# Altium PCB SUBBOARD-EMC_input.PcbDoc
Units mm, origin at the board's own origin, x right, y up, seen from the top; angles counter-clockwise.
Board outline 129 x 140.08 mm, 2 copper layers (Top Layer, Bottom Layer), stack 1.569 mm thick; 61 components, 29 nets, 159 pads, 8 vias.
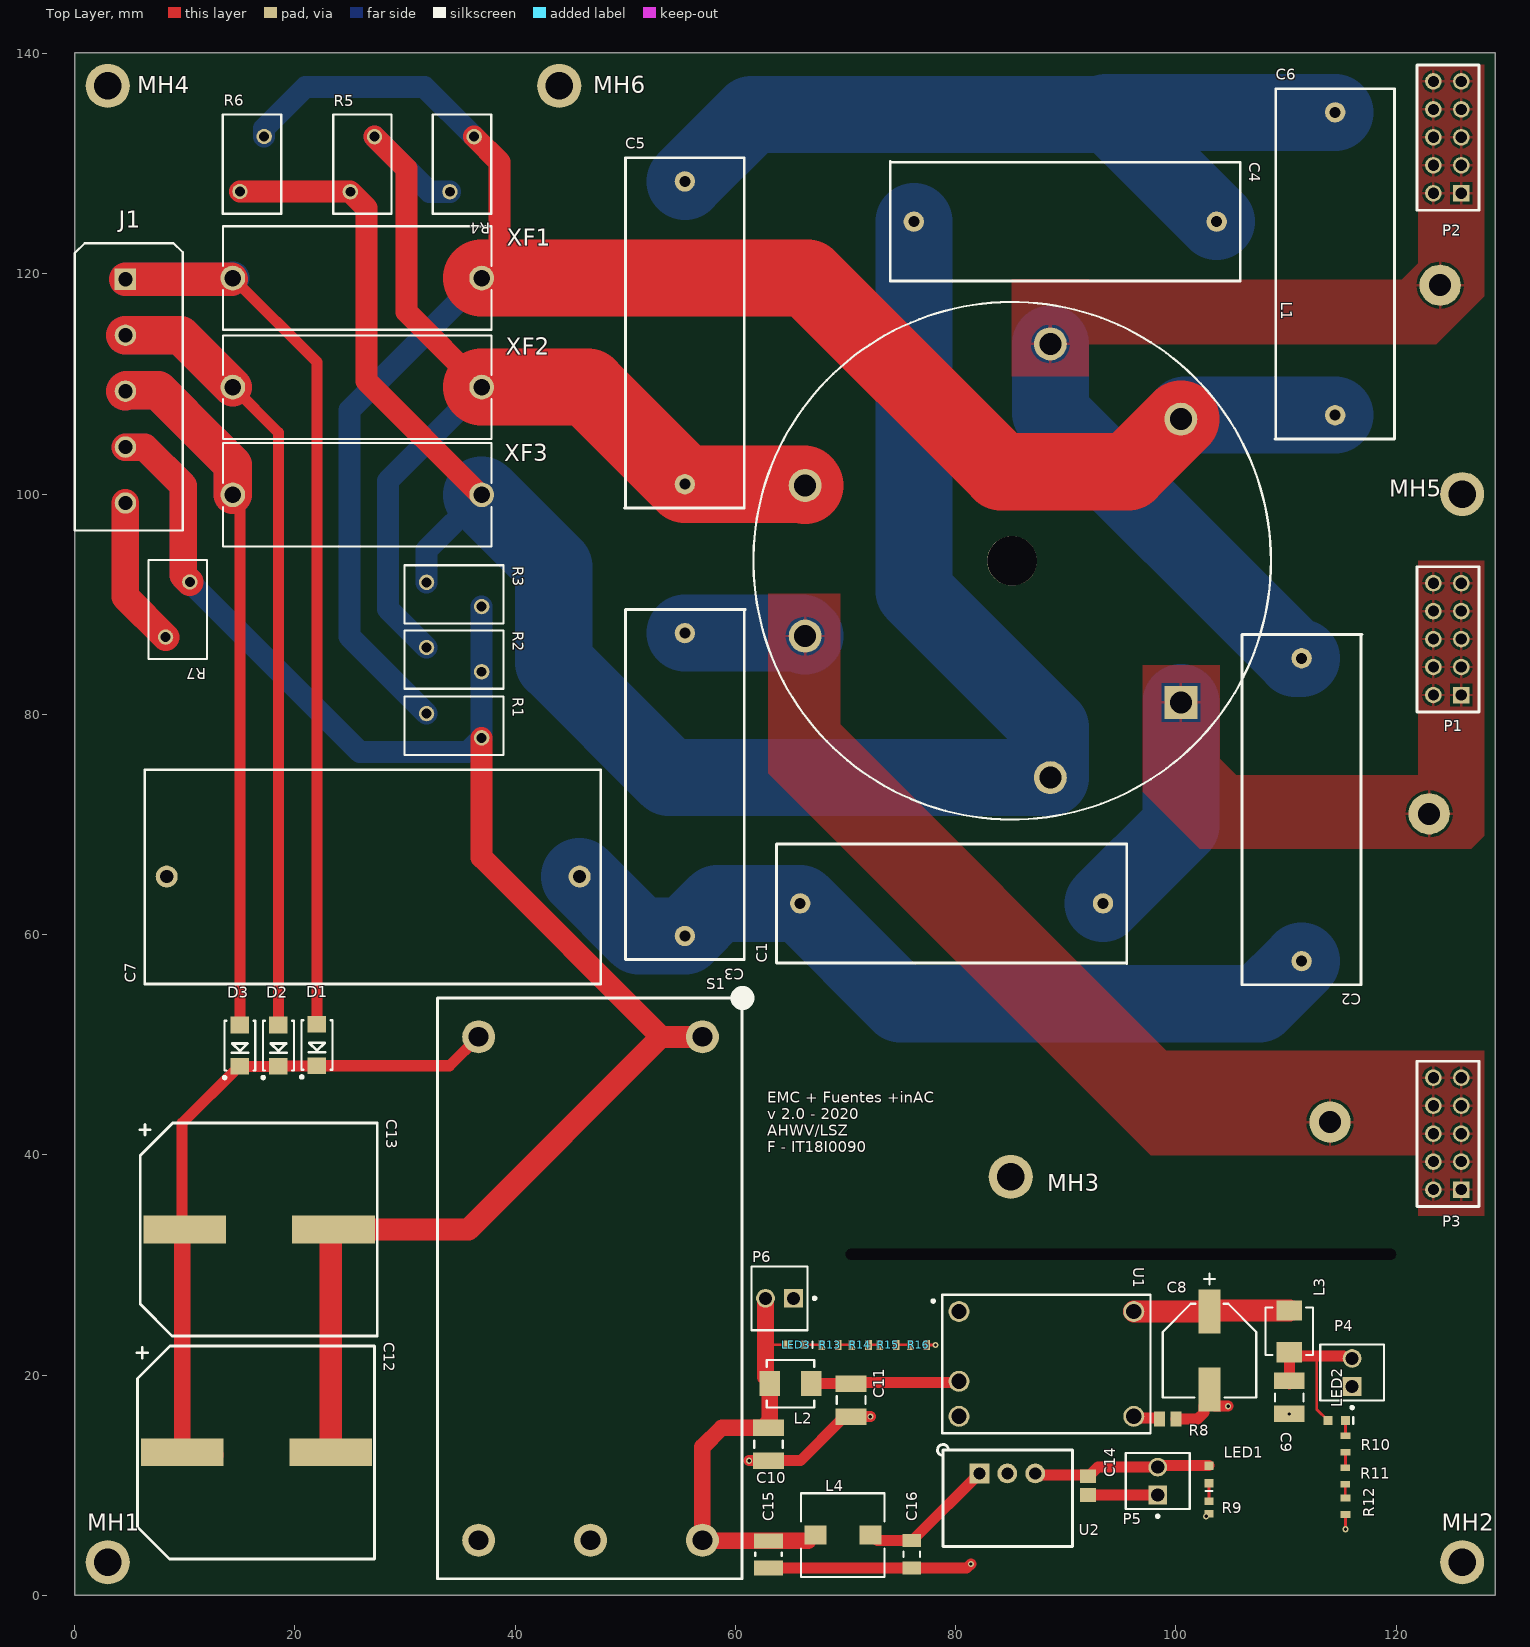
[diagram p0: Top Layer view]
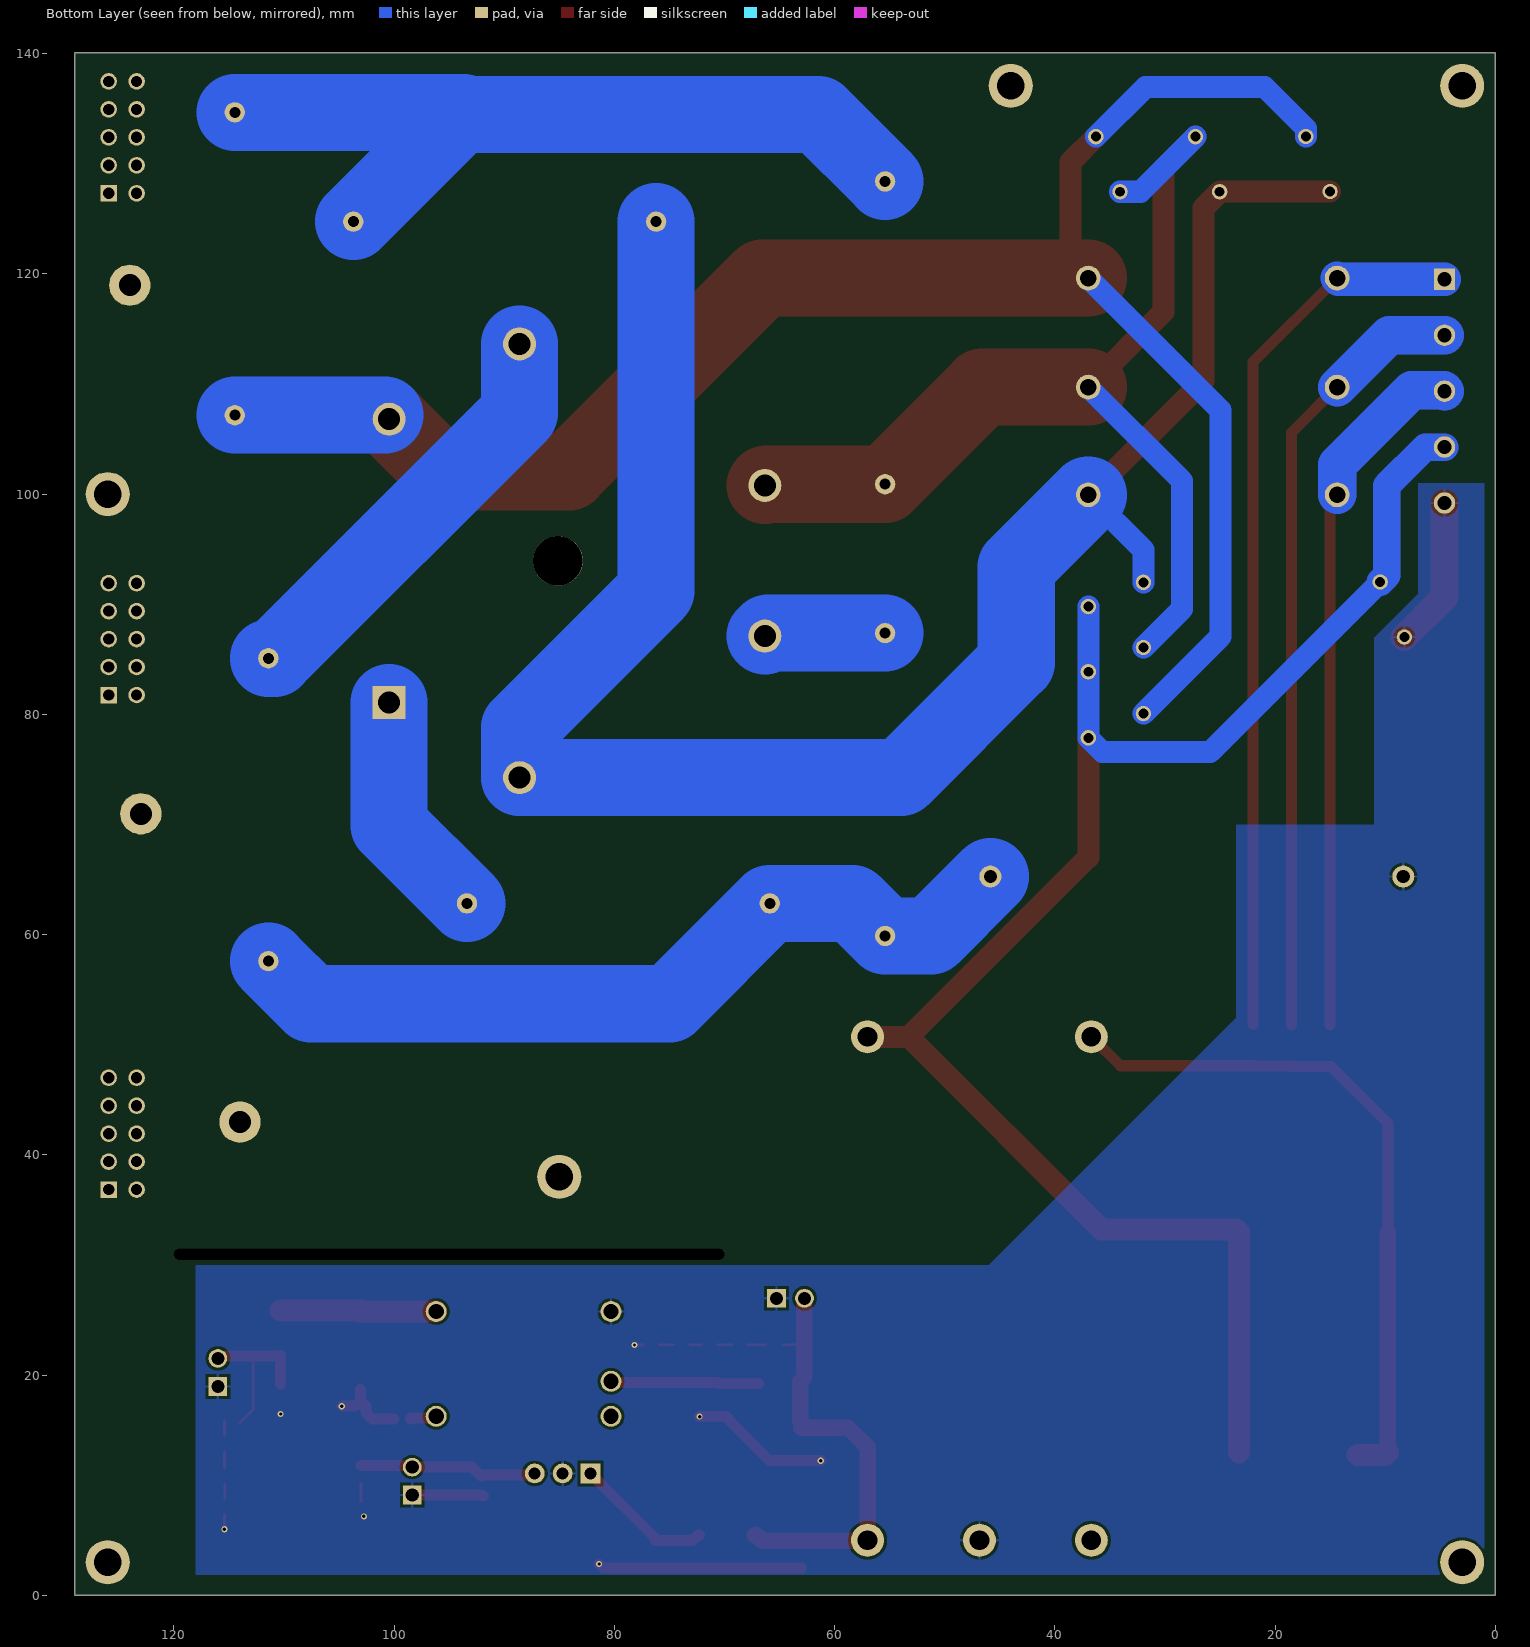
[diagram p1: Bottom Layer view, seen from below]
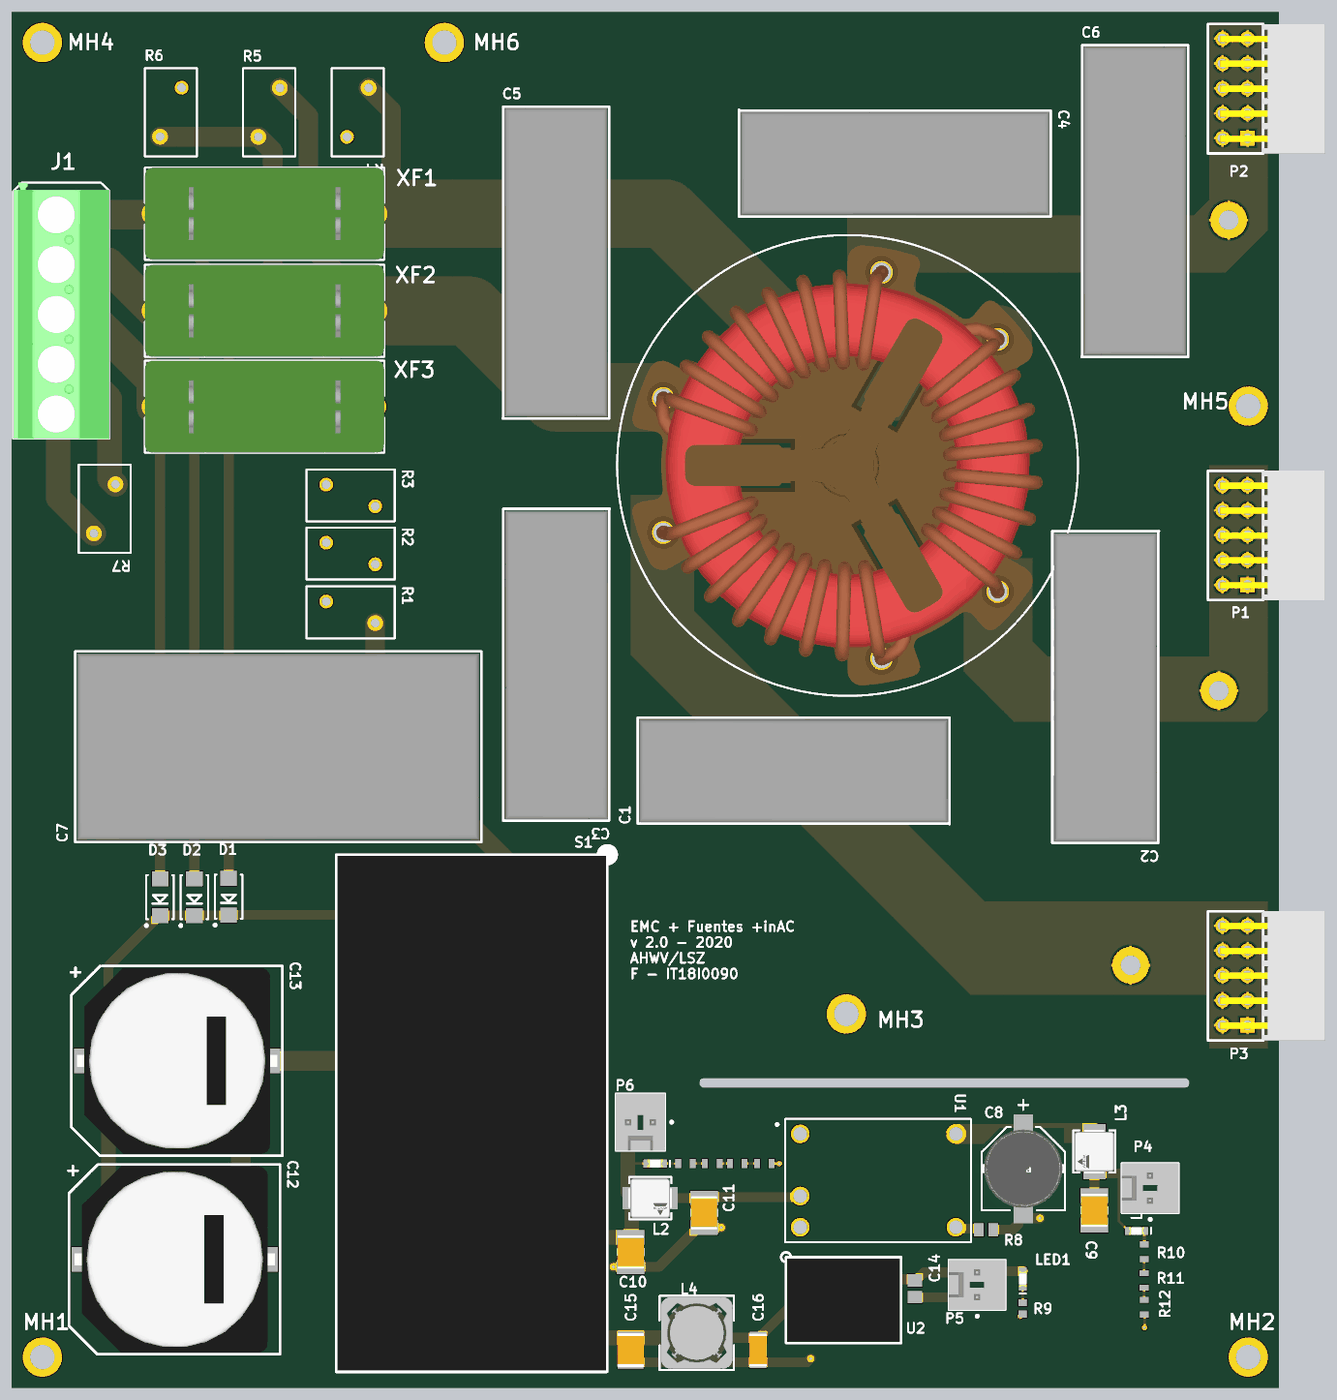
[diagram p2: 3D render of the assembled board from above, using the file's embedded part models]

## Layer stack, top to bottom
Top Solder: solder mask 0.0254, SM-001, Dk 4
Top Layer: signal copper 0.035
Dielectric 1: core 1.4986, Core-043, Dk 4.3
Bottom Layer: signal copper 0.035
Bottom Solder: solder mask 0.0254, SM-001, Dk 4

## Board outline
0,0 0,34.548 0,105.533 0,140.081 129,140.081 129,0

## Design rules (kind name [scope] priority, off if disabled: settings)
Clearance Clearance_HV [InNetClass('PhL[1..3]') or InNetClass('PhG[1..3]') or InNetClass('PhSI[1..3]')] p1: gap=1.5 ignorepadtopadclearanceinfootprint=FALSE // Added Clearence for the 220V power lines
Clearance [All] p2: gap=0.254 ignorepadtopadclearanceinfootprint=FALSE except(0: Arc-Hole Track-Hole SMDPad-Hole THPad-Hole Via-Hole Fill-Hole Poly-Hole Region-Hole Text-Hole)
Height [All] p1: minheight=0 maxheight=40 prefheight=12.7
PolygonConnect [All] p1: thpad.connectstyle=Relief thpad.reliefconductorwidth=0.254 thpad.reliefentries=4 thpad.polygonreliefangle="90 Angle" thpad.airgapwidth=0.254 smdpad.connectstyle=Relief smdpad.reliefconductorwidth=0.254 smdpad.reliefentries=4 smdpad.polygonreliefangle="90 Angle" smdpad.airgapwidth=0.254 via.connectstyle=Direct via.reliefconductorwidth=0.254 via.reliefentries=4 via.polygonreliefangle="90 Angle" via.airgapwidth=0.254
RoomDefinition SUBBOARD-EMC_input [InComponentClass('SUBBOARD-EMC_input')] p1: confinementstyle=ConfineIn formatcopy=TRUE lockcomponents=FALSE outline -10.124,-9.017 137,-9.017 137,145.034 -10.124,145.034
RoutingVias [All] p1: holewidth=0.711 width=1.27 viastyle="Through Hole" minholewidth=0.711 minwidth=1.27 maxholewidth=0.711 maxwidth=1.27
SolderMaskExpansion [All] p1: expansion=0.102 istentingtop=FALSE
Width [All] p1: maxlimit=10 minlimit=0.254 preferedwidth=0.254 minimp=50.000000 maximp=50.000000 favimp=50.000000
29 further rules are at their usual default settings.

## Classes and differential pairs
net class PhSI[1..3]: PhSI1 PhSI2 PhSI3
net class PhL[1..3]: PhL1 PhL2 PhL3
net class PhG[1..3]: PhG1 PhG2 PhG3

## Components (designator, comment, footprint, x,y, rotation, side; value= is the part's Value field where it differs from the comment)
C1 "PHE840MZ7100MF11R06L2" PHE840MZ7100MF11R06L2 79.631,62.83 r180 top
C2 "PHE840MZ7100MF11R06L2" PHE840MZ7100MF11R06L2 111.415,71.339 r270 top
C3 "PHE840MZ7100MF11R06L2" PHE840MZ7100MF11R06L2 55.408,73.625 r270 top
C4 "PHE840MZ7100MF11R06L2" PHE840MZ7100MF11R06L2 89.952,124.743 r0 top
C5 "PHE840MZ7100MF11R06L2" PHE840MZ7100MF11R06L2 55.408,114.646 r90 top
C6 "PHE840MZ7100MF11R06L2" PHE840MZ7100MF11R06L2 114.463,120.916 r90 top
C7 "PHE850ER7100MR03R06L2" PHE850ER7100MR03R06L2 27.1,65.267 r180 top
C8 "EEE-FK1H101P" FP-EEE-FK1H101P-MFG 103.05,22.217 r90 top value=100uF
C9 "C1210C225K5RACTU" CAPC3225X140X50ML20T25 110.3,17.967 r270 top
C10 "C1210C225K5RACTU" CAPC3225X140X50ML20T25 63,13.717 r270 top
C11 "C1210C225K5RACTU" CAPC3225X140X50ML20T25 70.5,17.717 r270 top
C12 "EEV-EB2W220M" EEV-EB2W220M 9.75,12.967 r0 top
C13 "EEV-EB2W220M" EEV-EB2W220M 10,33.217 r0 top
C14 "GRM21BR71A106KE51L" CAPC2013X140X45NL15T25 92,9.967 r90 top
C15 "UMK325BJ106KM-T" CAPC3225X270X60LL30T30 63,3.717 r270 top
C16 "UMK316AB7475KL-T" CAPC3216X180X55LL20T30 76,3.717 r270 top
D1 "BYG23T-M3/TR" BYG23T-M3/TR 22,49.967 r90 top
D2 "BYG23T-M3/TR" BYG23T-M3/TR 18.5,49.917 r90 top
D3 "BYG23T-M3/TR" BYG23T-M3/TR 15,49.917 r90 top
J1 "1715750" SHDR5W110P0X500_1X5_2532X980X1380P 4.608,119.51 r270 top
L1 "744833027110" "WE-TPB_Type 3XL_744833027110" 85.126,93.945 r270 top
L2 "IHLP1616BZER4R7M11" FP-IHLP-1616BZ-FP_1_8545x-MFG#1 65,19.217 r0 top
L3 "IHLP1616BZER4R7M11" FP-IHLP-1616BZ-FP_1_8545x-MFG#2 110.3,23.967 r270 top
L4 "744777910" WE-PD-M-PB 69.75,5.467 r0 top
LED1 "150060BS75000" 0603_A 103,10.967 r90 top
LED2 "150060BS75000" 0603_A 114.6,15.877 r180 top
LED3 "150060BS75000" 0603_A 65.5,22.742 r180 top
MH1 "_MH_2p5_4-round" _MH_2p5_4-round#1 3,3 r0 top
MH2 "_MH_2p5_4-round" _MH_2p5_4-round#1 126,3 r0 top
MH3 "_MH_2p5_4-round" _MH_2p5_4-round#2 85.68,37.697 r0 top
MH4 "_MH_2p5_4-round" _MH_2p5_4-round#3 3.23,134.617 r0 top
MH5 "_MH_2p5_4-round" _MH_2p5_4-round#4 126,100.617 r0 top
MH6 "_MH_2p5_4-round" _MH_2p5_4-round#5 44.37,133.907 r0 top
P1 "IPT1-105-01-S-D-RA" IPT1-105-01-S-D-RA 125.921,81.753 r180 top
P2 "IPT1-105-01-S-D-RA" IPT1-105-01-S-D-RA 125.921,127.318 r180 top
P3 "IPT1-105-01-S-D-RA" IPT1-105-01-S-D-RA 125.921,36.841 r180 top
P4 "22-27-2021" MOLX-22-27-2021_V 116,20.237 r90 top
P5 "22-27-2021" MOLX-22-27-2021_V 98.35,10.367 r90 top
P6 "22-27-2021" MOLX-22-27-2021_V 64,26.967 r180 top
R1 "VDRS07H300BSE" VISH-VDRS07-53x22-2_V 34.442,78.967 r0 top
R2 "VDRS07H300BSE" VISH-VDRS07-53x22-2_V 34.442,84.967 r0 top
R3 "VDRS07H300BSE" VISH-VDRS07-53x22-2_V 34.442,90.888 r0 top
R4 "VDRS07H300BSE" VISH-VDRS07-53x22-2_V 35.171,129.967 r270 top
R5 "VDRS07H300BSE" VISH-VDRS07-53x22-2_V 26.125,129.967 r270 top
R6 "VDRS07H300BSE" VISH-VDRS07-53x22-2_V 16.1,129.967 r90 top
R7 "VDRS07H300BSE" VISH-VDRS07-53x22-2_V 9.35,89.527 r270 top
R8 "ERA6AEB432V" RESC2013X60X40LL20T25 99.25,15.992 r180 top value="4.3 kOhm"
R9 "CRCW060382R0FKEA" RESC1609X50X30LL10T20 103,7.967 r270 top value="82 Ohms"
R10 "200 Ohm" CRCW0603200RFKEAHP 115.39,13.747 r90 top
R11 "200 Ohm" CRCW0603200RFKEAHP 115.38,10.827 r90 top
R12 "200 Ohm" CRCW0603200RFKEAHP 115.39,8.087 r90 top
R13 "200 Ohm" CRCW0603200RFKEAHP 68.6,22.742 r180 top
R14 "200 Ohm" CRCW0603200RFKEAHP 71.33,22.742 r180 top
R15 "200 Ohm" CRCW0603200RFKEAHP 73.87,22.742 r0 top
R16 "200 Ohm" CRCW0603200RFKEAHP 76.64,22.742 r180 top
S1 "RAC20-24SK" RAC20-K 57,50.717 r270 top
U1 "PTN78000HAH" EUS0005A 88.24,21.007 r0 top
U2 "R-78B5.0-2.0" R-78B5.0-2.0 82.15,11.067 r0 top
XF1 "696108003002" 696108003002 25.658,119.62 r180 top
XF2 "696108003002" 696108003002 25.658,109.714 r180 top
XF3 "696108003002" 696108003002 25.658,99.935 r180 top

## Footprints (in the part's own frame and the unit in brackets; to place one, negate y for a bottom-side part, rotate by r counter-clockwise, add the part's x,y. Pads: shape width x height; smd on the part's side, far side on the other; paste and mask are expansions set on the pad)
0603_A [mm] "Chip LED, 2-Leads, Body 1.6x0.8mm, IPC Medium Density"
  rect 0.8x0.8 smd: 1(-0.8,0) 2(0.8,0)
  silkscreen extent -1.5,-0.3 -1.5,0.3, body extent -0.8,-0.4 0.8,0.4, height 0.7
696108003002 [mm]
  round 2.25 hole 1.5: 1(-11.3,0) 2(11.3,0)
  silkscreen extent -12.2,-4.7 12.2,4.7, body extent -12.2,-4.7 12.2,4.7, height 11.55
_MH_2p5_4-round#1 [mm] "Matching hole, 2.5mm hole, 4mm pad (round)"
  round 4 hole 2.5: *(0,0)
_MH_2p5_4-round#2 [mm] "Matching hole, 2.5mm hole, 4mm pad (round)"
  round 4 hole 2.5: *(-0.68,0.303)
_MH_2p5_4-round#3 [mm] "Matching hole, 2.5mm hole, 4mm pad (round)"
  round 4 hole 2.5: *(-0.23,2.463)
_MH_2p5_4-round#4 [mm] "Matching hole, 2.5mm hole, 4mm pad (round)"
  round 4 hole 2.5: *(0,-0.617)
_MH_2p5_4-round#5 [mm] "Matching hole, 2.5mm hole, 4mm pad (round)"
  round 4 hole 2.5: *(-0.37,3.173)
BYG23T-M3/TR [mm] "Fast / Ultrafast Diode, 1.3 kV, 1 A, Single, 1.9 V, 75 ns, 18 A"
  rect 1.52x1.68 smd: 1(-1.88,0) 2(1.88,0)
  silkscreen extent -3.02,-1.4 2.25,1.51, body extent -2.25,-1.39 2.25,1.4, height 2.29
CAPC2013X140X45NL15T25 [mm] "Chip Capacitor, 2-Leads, Body 2.00x1.25mm, IPC Medium Density"
  rect 1.25x1.45 smd: 1(-0.85,0) 2(0.85,0)
  body extent -1.08,-0.7 1.07,0.7, height 1.4
CAPC3216X180X55LL20T30 [mm] "Chip Capacitor, 2-Leads, Body 3.4x1.8mm, IPC High Density"
  rect 1.2x1.7 smd: 1(-1.25,0) 2(1.25,0)
  silkscreen extent -0.25,-0.75 0.25,0.75, body extent -1.7,-0.9 1.7,0.9, height 1.8
CAPC3225X140X50ML20T25 [mm] "Chip Capacitor, 2-Leads, Body 3.40x2.70mm, IPC Low Density"
  rect 1.5x2.8 smd: 1(-1.5,0) 2(1.5,0)
  silkscreen extent -0.35,-1.3 0.35,1.3, body extent -1.7,-1.35 1.7,1.35, height 1.4
CAPC3225X270X60LL30T30 [mm] "Chip Capacitor, 2-Leads, Body 3.50x2.70mm, IPC High Density"
  rect 1.35x2.6 smd: 1(-1.225,0) 2(1.225,0)
  silkscreen extent -0.15,-1.2 0.15,1.2, body extent -1.75,-1.35 1.75,1.35, height 2.7
CRCW0603200RFKEAHP [mm] "RES SMD 200 OHM 1% 1/3W 0603"
  rect 0.6x0.9 smd: 1(-0.75,0) 2(0.75,0)
  body extent -0.75,-0.48 0.75,0.48, height 0.55
EEV-EB2W220M [mm] "Cap Aluminum 22uF 450V 20% (18 X 21.5mm) SMD 560mA 5000 hr 105°C T/R"
  rect 7.5x2.5 smd: 1(0,0) 2(13.5,0)
  silkscreen extent -4.1,-9.67 17.47,9.67, body extent -3.45,-9.5 16.95,9.5, height 21.5
EUS0005A [mm] "5-Leads, Plastic Special Shape, Body 18.92x12.57mm"
  round 1.9 hole 1.4: 1(-7.94,4.76) 2(-7.94,-1.58) 3(-7.94,-4.76) 4(7.94,-4.76) 5(7.94,4.76)
  silkscreen extent -10.41,-6.28 9.46,6.28, body extent -9.46,-6.28 9.46,6.28, height 8.5
FP-EEE-FK1H101P-MFG [mm]
  rect 4x2 smd paste+0 mask+0: 1(-3.55,0) 2(3.55,0)
  silkscreen extent -4.25,-4.25 7,4.25, body extent -5.8,-4.5 5.8,4.5, height 0.25
FP-IHLP-1616BZ-FP_1_8545x-MFG#1 [mil]
  rect 73.01x90 smd paste+0 mask+0: 1(-74.5,0) 2(74.5,0)
  silkscreen extent -85,-85 85,85, body extent -88,-80 88,80, height 79
FP-IHLP-1616BZ-FP_1_8545x-MFG#2 [mil]
  rect 73.01x90 smd: 1(-74.5,0) 2(74.5,0)
  silkscreen extent -85,-85 85,85, body extent -115,-89 115,89, height 10
IPT1-105-01-S-D-RA [mm]
  rect 1.5x1.5 hole 1.02: 1(0,0)
  round 1.5 hole 1.02: 2(2.54,0) 3(0,-2.54) 4(2.54,-2.54) 5(0,-5.08) 6(2.54,-5.08) 7(0,-7.62) 8(2.54,-7.62) 9(0,-10.16) 10(2.54,-10.16)
  silkscreen extent -1.6,-11.65 4.03,1.55, body extent -7.9,-11.65 2.83,1.55, height 5.09
MOLX-22-27-2021_V [mm] "Header, 2-Leads, Body 5.8x5.08mm"
  rect 1.7x1.7 hole 1.19: 1(-1.27,0)
  round 1.7 hole 1.19: 2(1.27,0)
  silkscreen extent -3.31,-2.9 2.54,2.9, body extent -2.54,-2.9 2.54,2.9, height 11.72
PHE840MZ7100MF11R06L2 [mm] "CAP FILM 1UF 20% 760VDC RADIAL - KEMET"
  round 1.85 hole 1: 1(-13.75,0) 2(13.75,0)
  silkscreen extent -15.9,-5.4 15.9,5.48, body extent -15.73,-5.23 15.77,5.28, height 20.5
PHE850ER7100MR03R06L2 [mm] "CAP FILM 1UF 20% 1.25KVDC RADIAL KEMET"
  round 2 hole 1.2: 1(-18.75,0) 2(18.75,0)
  silkscreen extent -20.68,-9.7 20.75,9.75, body extent -20.45,-9.5 20.55,9.5, height 36
R-78B5.0-2.0 [mm] "Non-Isolated DC/DC Converters 6.5-32Vin 5Vout 2A SIP3"
  rect 1.8x1.8 hole 1.1: 1(0,0)
  round 1.8 hole 1.1: 2(2.54,0) 3(5.08,0)
  silkscreen extent -3.8,-6.63 8.45,2.62, body extent -3.17,-6.5 8.33,2, height 17.5
RAC20-K [mm]
  round 3 hole 1.8: 1(0,0) 2(0,-20.32) 3(45.72,-20.32) 4(45.72,-10.16) 5(45.72,0)
  silkscreen extent -3.61,-24.05 49.22,3.71, body extent -3.4,-23.92 49.1,3.47, height 23
RESC1609X50X30LL10T20 [mm] "Chip Resistor, 2-Leads, Body 1.55x0.85mm, IPC High Density"
  rect 0.7x0.85 smd: 1(-0.575,0) 2(0.575,0)
  body extent -0.82,-0.48 0.82,0.48, height 0.5
RESC2013X60X40LL20T25 [mm] "Chip Resistor, 2-Leads, Body 2.00x1.25mm, IPC High Density"
  rect 1x1.35 smd: 1(-0.75,0) 2(0.75,0)
  body extent -1.1,-0.72 1.1,0.72, height 0.6
SHDR5W110P0X500_1X5_2532X980X1380P [mm]
  rect 1.95x1.95 hole 1.3: 1(0,0)
  round 1.95 hole 1.3: 2(5.08,0) 3(10.16,0) 4(15.24,0) 5(20.32,0)
  silkscreen extent -3.28,-4.6 22.82,5.2, body extent -3.28,-4.6 22.86,5.2, height 14.25
VISH-VDRS07-53x22-2_V [mm] "THD, 2-Leads, Body 9x5.3mm, Height 11mm"
  round 1.4 hole 0.9: 1(-2.49,1.1) 2(2.51,-1.1)
  silkscreen extent -4.5,-2.65 4.5,2.65, body extent -4.48,-2.65 4.5,2.65, height 10.96
WE-PD-M-PB [mm] "SMD Inductor, 2-Leads, Body 7.3 x 7.3 mm"
  rect 2x1.7 smd: 1(-2.5,0) 2(2.5,0)
  silkscreen extent -3.8,-3.8 3.8,3.8, body extent -3.65,-3.65 3.65,3.65, height 4.09
"WE-TPB_Type 3XL_744833027110" [mm] "Three Phase Common Mode Power Line Choke, body diameter 47mm"
  rect 3x3 hole 2: 1(12.856,15.321)
  round 3 hole 2: 2(-19.696,3.473) 3(6.84,-18.794) 4(19.696,3.473) 5(-6.84,-18.794) 6(-12.856,15.321)
  round 4.5 hole 4.5 unplated: MH1(0,0)
  silkscreen extent -23.5,-23.5 23.5,23.5, body extent -22.44,-21.98 22.44,19.93, height 36.8

## Part data
C1 C2 C3 C4 C5 C6: "CAP FILM 1UF 20% 760VDC RADIAL", Capacitance=1uF, Case/Package=Radial, Dielectric=PP, Manufacturer=KEMET, Max Operating Temperature=105°C, Min Operating Temperature=-55°C, Package Quantity=216, Supplier Part Number 1=399-5431-ND, Tolerance=20%, Voltage=760V, Voltage Rating (AC)=280V, Category="Film Capacitors", ComponentLink1Description=https://datasheet.ciiva.com/241/phe840m20series-241827.pdf?src-supplier=Digi-Key, ComponentLink1URL=https://datasheet.ciiva.com/241/phe840m20series-241827.pdf?src-supplier=Digi-Key, ComponentLink2Description=https://datasheet.ciiva.com/17239/datasheetpn-f840fe105m275c-17239253.pdf?src-supplier=Avnet+Europe, ComponentLink2URL=https://datasheet.ciiva.com/17239/datasheetpn-f840fe105m275c-17239253.pdf?src-supplier=Avnet+Europe, ComponentLink3Description=https://datasheet.ciiva.com/14589/70096376-14589271.pdf?src-supplier=Allied+Electronics, ComponentLink3URL=https://datasheet.ciiva.com/14589/70096376-14589271.pdf?src-supplier=Allied+Electronics, ComponentLink4Description=https://datasheet.ciiva.com/13403/f3294-phe840m-540905-13403690.pdf?src-supplier=Mouser, ComponentLink4URL=https://datasheet.ciiva.com/13403/f3294-phe840m-540905-13403690.pdf?src-supplier=Mouser, Depth=10.5mm, Dielectric Material=PP, Dissipation Factor=0.4%, Height=20.5mm, Height - Seated (Max)=0.807inch, Lead Diameter=0.8mm, Lead Length=30mm, Lead Pitch=27.5mm, Length=31.5mm, Manufacturer Part Number=PHE840MZ7100MF11R06L2, Mount="Through Hole", Number of Pins=2, Packaging=Tray, Pricing 1="1=2,83000, 10=2,28500, 50=1,99440, 100=1,74500, 500=1,32954, 1000=1,16335, 2500=1,12180, 5000=1,09338 (USD)", Radiation Hardening=No, RoHS=Yes, Stock 1=496, Supplier 1=Digi-Key, Supplier 2=Newark, Supplier 3=Arrow, Supplier 4=Mouser, Supplier 5="Allied Electronics", Supplier Part Number 2=61M2385, Supplier Part Number 3=PHE840MZ7100MF11R06L2, Supplier Part Number 4=80-PHE840MZ7100MF11R, Supplier Part Number 5=70096381, Termination=Radial, Voltage Rating (DC)=760V, Width=0.413inch
C7: "CAP FILM 1UF 20% 1.25KVDC RADIAL", Capacitance=1uF, Case/Package=Radial, Dielectric=PP, Manufacturer=KEMET, Max Operating Temperature=110°C, Min Operating Temperature=-55°C, Package Quantity=91, Supplier Part Number 1=399-5425-ND, Tolerance=20%, Voltage=1.25kV, Voltage Rating=300V, Category="Film Capacitors", ComponentLink1Description=https://datasheet.ciiva.com/11791/0900766b807a221a-11791526.pdf?src-supplier=RSComponents, ComponentLink1URL=https://datasheet.ciiva.com/11791/0900766b807a221a-11791526.pdf?src-supplier=RSComponents, ComponentLink2Description=https://datasheet.ciiva.com/241/f3294-phe850-241880.pdf?src-supplier=Digi-Key, ComponentLink2URL=https://datasheet.ciiva.com/241/f3294-phe850-241880.pdf?src-supplier=Digi-Key, Depth=19mm, Dielectric Material=PP, Height=19mm, Height - Seated (Max)=1.417inch, Lead Diameter=1mm, Lead Free="Lead Free", Lead Pitch=37.5mm, Length=41mm, Manufacturer Part Number=PHE850ER7100MR03R06L2, Mount="Through Hole", Packaging=Tray, Pricing 1="1=5,26000, 10=4,73700, 50=4,10560, 100=3,57930, 500=2,94768, 1000=2,77038 (USD)", Radiation Hardening=No, RoHS=Yes, Stock 1=10227, Supplier 1=Digi-Key, Supplier 2=RSComponents, Supplier 3=Mouser, Supplier Part Number 2=6168017, Supplier Part Number 3=80-PHE850ER7100MR03, Termination=Radial, Voltage Rating (AC)=300V, Voltage Rating (DC)=1.25kV, Width=36mm
C8: library part CMP-05427-000005-1, "CAP ALUM 100UF 20% 50V SMD", Capacitance=100uF, Leakage Current=50uA, Manufacturer="Panasonic Electronic Components", Package=0, Ripple Current=350mA, Temperature="-55°C to +105°C", Temperature Range High=+105°C, Temperature Range Low=-55°C, Tolerance=20%, Voltage Rating=50V, Automotive=Yes, Automotive Grade="Grade 2", Category=Cap, ComponentLink2Description=Datasheet, ComponentLink2URL=https://industrial.panasonic.com/cdbs/www-data/pdf/RDE0000/ABA0000C1181.pdf, Device Class L1="Passive Components", Device Class L2=Capacitors, Device Class L3="Aluminum Electrolytic Capacitors", Digikey Description="CAP ALUM 100UF 20% 50V SMD", Dissipation Factor=10%, ESR=0.34Ω, Height=10.5mm, Lead Free=Yes, Life=2000Hours, Manufacturer Part Number=EEE-FK1H101P, Material=Aluminum, Mouser Description="Cap Aluminum Lytic 100uF 50V 20% (8 X 10.2mm) SMD 350mA 2000h 105C Automotive T/R", Octopart=https://octopart.com/eeefk1h101p-panasonic-4642841, RoHS=TRUE
C9 C10 C11: library part CMP-2000-06019-1, "Chip Capacitor, 2.2 uF, +/- 10%, 50 V, -55 to 125 degC, 1210 (3225 Metric), RoHS, Tape and Reel", Capacitance=2.2uF, Capacitance - nF=2200nF, Case Code - in=1210, Case Code - mm=3225, Case Height=1.25mm, Case Length=3.2mm, Case Width=2.5mm, Dielectric=X7R, Manufacturer=Kemet, Maximum Operating Temperature=+125C, Minimum Operating Temperature=-55C, Operating Temperature Range=-55Cto+125C, Package / Case=1210(3225metric), Package Description="2-Pin Surface Mount Device, Body 3.2 x 2.5 mm", Temperature Coefficient / Code=+/-15%, Tolerance=10%, Voltage Rating=50V, Brand=Kemet, Class=Class1, Datasheet URL=http://www.kemet.com/docfinder?Partnumber=C1210C225K5RACTU, Datasheet Version=02/2016, Dimensions=2.5mmWx3.2mmLx1.25mmH, Factory Pack Quantity=2500, Manufacturer URL=http://www.kemet.com/, Mounting Technology=SurfaceMount, Package Reference=1210, Packaging=Reel, Product=GeneralTypeMLCCs, Product Category=MultilayerCeramicCapacitorsMLCC-SMD/SMT, RoHS=Details, Series=C1210C, Termination Style=SMD/SMT, Type=SMDMLCCX7R6.3-250VDCCommericalGrade, Voltage Rating DC=50V
C12 C13: "CAP, ALU ELEC, 22UF, 450V, SMD", Capacitance=22uF, Case/Package=Radial, Dielectric Material=Aluminium, Leakage Current=604uA, Manufacturer=Panasonic, Max Operating Temperature=105°C, Min Operating Temperature=-25°C, Package Quantity=1, Ripple Current=560mA, Supplier Part Number 1=PCE3598CT-ND, Tolerance=20%, Voltage=450V, Category="Aluminum Electrolytic Capacitors", ComponentLink1Description=https://datasheet.ciiva.com/94/aba0000ce11-94804.pdf?src-supplier=Digi-Key, ComponentLink1URL=https://datasheet.ciiva.com/94/aba0000ce11-94804.pdf?src-supplier=Digi-Key, ComponentLink2Description=https://datasheet.ciiva.com/94/aba0000ce11-94805.pdf?src-supplier=Digi-Key, ComponentLink2URL=https://datasheet.ciiva.com/94/aba0000ce11-94805.pdf?src-supplier=Digi-Key, ComponentLink3Description=https://datasheet.ciiva.com/26823/getdatasheetpartid-52298-26823205.pdf?src-supplier=Verical, ComponentLink3URL=https://datasheet.ciiva.com/26823/getdatasheetpartid-52298-26823205.pdf?src-supplier=Verical, ComponentLink4Description=https://datasheet.ciiva.com/94/aba0000ce11-94806.pdf?src-supplier=Digi-Key, ComponentLink4URL=https://datasheet.ciiva.com/94/aba0000ce11-94806.pdf?src-supplier=Digi-Key, ComponentLink5Description=https://datasheet.ciiva.com/14594/70257799-14594134.pdf?src-supplier=Allied+Electronics, ComponentLink5URL=https://datasheet.ciiva.com/14594/70257799-14594134.pdf?src-supplier=Allied+Electronics, ComponentLink6Description=https://datasheet.ciiva.com/8081/aba0000ce11-8081608.pdf?src-supplier=Element14, ComponentLink6URL=https://datasheet.ciiva.com/8081/aba0000ce11-8081608.pdf?src-supplier=Element14, ComponentLink7Description=https://datasheet.ciiva.com/46379/1678957-46379208.pdf?src-supplier=Element14, ComponentLink7URL=https://datasheet.ciiva.com/46379/1678957-46379208.pdf?src-supplier=Element14, ComponentLink8Description=https://datasheet.ciiva.com/14603/70257799-14603849.pdf?src-supplier=Allied+Electronics, ComponentLink8URL=https://datasheet.ciiva.com/14603/70257799-14603849.pdf?src-supplier=Allied+Electronics, ComponentLink9Description=https://datasheet.ciiva.com/31418/1678957-31418299.pdf?src-supplier=Farnell, ComponentLink9URL=https://datasheet.ciiva.com/31418/1678957-31418299.pdf?src-supplier=Farnell, ComponentLink10Description=https://datasheet.ciiva.com/46372/1678957-46372111.pdf?src-supplier=Element14, ComponentLink10URL=https://datasheet.ciiva.com/46372/1678957-46372111.pdf?src-supplier=Element14, Diameter=18mm, Height=21.5mm, Height - Seated (Max)=0.846inch, Lead Free="Lead Free", Lead Length=6.7mm, Lead Pitch=6.7mm, Length=21.5mm, Life (Hours)=5000Hour, Manufacturer Part Number=EEV-EB2W220M, Mount="Surface Mount,PCB", Number of Pins=21, Packaging="Tape and Reel", Pricing 1="1=3,73000, 10=3,00800 (USD)", Radiation Hardening=No, REACH SVHC="No SVHC", Ripple Current (AC)=560mA, RoHS=Yes, Stock 1=806, Supplier 1=Digi-Key, Supplier 2=Digi-Key, Supplier 3=Digi-Key, Supplier 4=Newark, Supplier 5=Mouser, Supplier 6=Farnell, Supplier Part Number 2=PCE3598DKR-ND, Supplier Part Number 3=PCE3598TR-ND, Supplier Part Number 4=85Y5181, Supplier Part Number 5=667-EEV-EB2W220M, Supplier Part Number 6=2326352, Termination=SMD/SMT, Voltage Rating=450V, Voltage Rating (DC)=450V, Width=1.2mm
C14: library part CMP-2007-03395-1, Manufacturer=Murata, Part Number=GRM21BR71A106KE51L
C15: library part CMP-2000-07360-1, "Chip Capacitor, 10 uF, +/- 10%, 50 V, -55 to 85 degC, 1210 (3225 Metric), RoHS, Tape and Reel", Capacitance=10µF, Manufacturer="Taiyo Yuden", Operating Temperature=-55°C~85°C, Package / Case=1210(3225Metric), Package Description="2-Pin Surface Mount Device, Body 3.2 x 2.5 mm", Package Reference=1210, Ratings=-, Standard Package=500, Temperature Coefficient=X5R, Tolerance=±10%, Voltage - Rated=50V, Applications=GeneralPurpose, Catalog Drawings=xMKSeries_1210_2.5, Category=Capacitors, Datasheet URL=https://datasheet.ciiva.com/30051/155umk325bj106km-t-30051915.pdf, Datasheet Version=05/2014, Family=CeramicCapacitors, Features=-, Height - Seated (Max)=-, Lead Spacing=-, Lead Style=-, Manufacturer URL=http://www.t-yuden.com/, Mounting Technology=SurfaceMount, Mounting Type=SurfaceMount,MLCC, Online Catalog=MSeries, Other Names=587-2247-2CEUMK325BJ106KM-TQ4177041UMK325BJ106KM-T-NDUMK325BJ106KMT, Packaging=Tape&Reel(TR), Series=M, Size / Dimension="0.126\"Lx0.098\"W(3.20mmx2.50mm)", Thickness (Max)="0.106\"(2.70mm)"
C16: library part CMP-2000-07358-1, "Chip Capacitor, 4.7 uF, +/- 10%, 50 V, -55 to 125 degC, 1206 (3216 Metric), RoHS, Tape and Reel", Capacitance=4.7µF, Manufacturer="Taiyo Yuden", Operating Temperature=-55°C~125°C, Package / Case=1206(3216Metric), Package Description="2-Pin Surface Mount Device, Body 3.2 x 1.6 mm", Package Reference=1206, Ratings=-, Standard Package=1, Temperature Coefficient=X7R, Tolerance=±10%, Voltage - Rated=50V, Applications=GeneralPurpose, Catalog Drawings=xMKSeries_1206_1.6, Category=Capacitors, Datasheet URL=http://datasheet.octopart.com/UMK316AB7475KL-T-Taiyo-Yuden-datasheet-62109650.pdf, Datasheet Version=02/2016, Family=CeramicCapacitors, Features=-, Height - Seated (Max)=-, Lead Spacing=-, Lead Style=-, Manufacturer URL=http://www.t-yuden.com/, Mounting Technology=SurfaceMount, Mounting Type=SurfaceMount,MLCC, Online Catalog=MSeries, Other Names=587-2994-6, Packaging=Digi-Reel®, Series=M, Size / Dimension="0.126\"Lx0.063\"W(3.20mmx1.60mm)", Thickness (Max)="0.071\"(1.80mm)", Voltage Rating DC=50V
D1 D2 D3: "DIODE AVALANCHE 1300V 1A DO214AC", Average Rectified Current=1A, Case/Package=SMA, Forward Voltage=1.9V, Manufacturer="Vishay Semiconductors", Max Forward Surge Current (Ifsm)=18A, Max Operating Temperature=150°C, Max Power Dissipation=800mW, Max Repetitive Reverse Voltage (Vrrm)=1.3kV, Min Operating Temperature=-55°C, Package Quantity=1, Peak Reverse Current=5uA, Supplier Part Number 1=70AC6454, Zener Voltage=200V, Category="Rectifier Diodes", ComponentLink1Description=https://datasheet.ciiva.com/23642/byg23t-23642320.pdf?src-supplier=Newark, ComponentLink1URL=https://datasheet.ciiva.com/23642/byg23t-23642320.pdf?src-supplier=Newark, ComponentLink2Description=https://datasheet.ciiva.com/30479/0900766b810d43bd-30479333.pdf?src-supplier=RSComponents, ComponentLink2URL=https://datasheet.ciiva.com/30479/0900766b810d43bd-30479333.pdf?src-supplier=RSComponents, ComponentLink3Description=https://datasheet.ciiva.com/4454/byg23t-85630-4454047.pdf?src-supplier=Mouser, ComponentLink3URL=https://datasheet.ciiva.com/4454/byg23t-85630-4454047.pdf?src-supplier=Mouser, ComponentLink4Description=https://datasheet.ciiva.com/920/byg23t-920130.pdf?src-supplier=Digi-Key, ComponentLink4URL=https://datasheet.ciiva.com/920/byg23t-920130.pdf?src-supplier=Digi-Key, ComponentLink5Description=https://datasheet.ciiva.com/920/byg23t-920131.pdf?src-supplier=Digi-Key, ComponentLink5URL=https://datasheet.ciiva.com/920/byg23t-920131.pdf?src-supplier=Digi-Key, ComponentLink6Description=https://datasheet.ciiva.com/920/byg23t-920132.pdf?src-supplier=Digi-Key, ComponentLink6URL=https://datasheet.ciiva.com/920/byg23t-920132.pdf?src-supplier=Digi-Key, ComponentLink7Description=https://datasheet.ciiva.com/1178/byg23t-1178213.pdf?src-supplier=Element14, ComponentLink7URL=https://datasheet.ciiva.com/1178/byg23t-1178213.pdf?src-supplier=Element14, Contact Plating=Tin,Matte, Diode Type=Avalanche, Element Configuration=Single, Forward Current=1A, Height=2.29mm, Length=4.5mm, Manufacturer Part Number=BYG23T-M3/TR, Max Reverse Voltage (DC)=1.3kV, Max Surge Current=18A, Mount="Surface Mount", Number of Pins=2, Packaging="Tape and Reel", Peak Non-Repetitive Surge Current=18A, Pricing 1="1=0.16100, 10=0.16100, 25=0.16100, 50=0.16100, 100=0.16100, 250=0.16100, 500=0.16100, 1000=0.14800 (USD)", Radiation Hardening=No, REACH SVHC=Unknown, Recovery Time=75ns, Reverse Recovery Time=75ns, Reverse Voltage=1.3kV, RoHS=Yes, Stock 1=6980, Supplier 1=Newark, Width=2.79mm
J1: "Phoenix Contact MKDS 1.5/ 5-5.08, 5 Way PCB Terminal Block", Color=Green, Current=15A, Current Rating=17.5A, Manufacturer="Phoenix Contact", Package Quantity=50, Supplier Part Number 1=277-13762-ND, Voltage=300V, Voltage Rating=400V, Category="Terminal Blocks", ComponentLink1Description=https://datasheet.ciiva.com/26340/788258-da-01-en-printklemme-1715750-250-st-26340992.pdf?src-supplier=Conrad, ComponentLink1URL=https://datasheet.ciiva.com/26340/788258-da-01-en-printklemme-1715750-250-st-26340992.pdf?src-supplier=Conrad, Connector Type=Screw, Contact Material=Tin, Height=17.3mm, Housing Color=Green, Housing Material=Nylon, Length=9.8mm, Manufacturer Part Number=1715750, Mount="Through Hole", Number of Levels=1, Number of Pins=5, Number of Positions=5, Number of Positions Per Level=5, Packaging=Bulk, Pitch=0.2inch, Pricing 1="1=3.30000, 10=3.16400, 50=3.02620, 100=2.94360, 250=2.75100, 500=2.53092, 1000=2.33834, 2500=2.22832, 5000=2.09077 (USD)", RoHS=Yes, Stock 1=212, Supplier 1=Digi-Key, Termination=Screw, Weight=1.269863oz, Width=27.94mm, Wire Gauge (Max)=30AWG, Wire Gauge (Min)=14AWG
L1: "WE-TPB Common Mode Power Line Choke, Type 3XL, 2.7mH, 11A, 500V", DC Resistance max.=18mOhm, Inductance=2.7mH, Insulation Test Voltage=2500VAC, Manufacturer="Wurth Elektronik", Operating Temperature="-40 to +125degC", Rated Current=11A, Rated Voltage=500VAC, Supplier Part Number 1=732-13597-ND, ComponentLink1Description=Manufacturer, ComponentLink1URL=http://www.we-online.de, ComponentLink2Description=Datasheet, ComponentLink2URL=https://www.we-online.com/catalog/datasheet/744833027110.pdf, Manufacturer Part Number=744833027110, Mounting Technology=THT, Packaging="Tray and Carton", Published Date="April 2020", Size="Type 3XL", Supplier 1=Digi-Key, Supplier 2=Newark, Supplier 3=Mouser, Supplier 4=Farnell, Supplier Part Number 2=28AH8224, Supplier Part Number 3=710-744833027110, Supplier Part Number 4=3221513
L2 L3: library part CMP-02424-000576-1, "Fixed Inductors Commercial Low DCR Series SMT 4.7uH 1.7A 105mΩ 20%", Case/Package=1616, Current Rating=1.7A, DC Resistance (DCR)=105mR, Inductance=4.7uH, Inductance Tolerance=20%, Max Operating Temperature=125°C, Min Operating Temperature=-55°C, Package Quantity=4000, Saturation Current=1.75A, Self Resonant Frequency=29MHz, Test Frequency=100kHz, Contact Plating=Tin, Core Material=Ferrite, Depth=4.31mm, Height=2mm, Height - Seated (Max)=0.079inch, Lead Free="Lead Free", Length=4.7mm, Max DC Current=1.7A, Military Standard=Not, Mount="Surface Mount", Number of Pins=1616, Packaging="Tape and Reel", Radiation Hardening=No, RMS Current (Irms)=1.7A, Shielding=Shielded, Termination=SMD/SMT, Tolerance=20%, Width=4.06mm
L4: library part CMP-0227-00229-1, "SMD-Shielded Power Inductor WE-PD, L = 10.0 µH", Inductance="10.0 µH", ComponentLink1Description="Manufacturer Link", ComponentLink1URL=http://www.we-online.com, ComponentLink2Description=Datasheet, ComponentLink2URL=http://www.we-online.de/katalog/media/pdf/744777910.pdf, DatasheetVersion="ver 10, Jan-2008", PackageDescription="SMD Inductor, 2-Leads, Body 7.3 x 7.3 mm", PackageReference=WE-PD-M-PB, PackageVersion=2008
LED1 LED2 LED3: library part CMP-1426-00003-1, "SMD mono-color Chip LED, WL-SMCW, Blue", Color=Blue, Manufacturer="Wuerth Elektronik", ComponentLink1Description="Manufacturer URL", ComponentLink1URL=http://www.we-online.com, ComponentLink2Description=Datasheet, ComponentLink2URL=http://katalog.we-online.com/led/datasheet/150060BS75000.pdf, PackageReference=0603_A, PartNumber=150060BS75000
MH1 MH2 MH3 MH4 MH5 MH6: "matching hole 2.5 hole, 4mm pad (round)"
P1 P2 P3: "CONN PLUG .100\" 10POS DL PCB R/A", Color=Black, Manufacturer=Samtec, Max Current Rating=8A, Max Operating Temperature=125°C, Max Voltage Rating (AC)=550V, Min Operating Temperature=-55°C, Supplier Part Number 1=SAM8101-ND, Category=Connectors, ComponentLink1Description=https://datasheet.ciiva.com/716/ipt1-1xx-xx-xx-d-ra-xxx-mkt-716221.pdf?src-supplier=Digi-Key, ComponentLink1URL=https://datasheet.ciiva.com/716/ipt1-1xx-xx-xx-d-ra-xxx-mkt-716221.pdf?src-supplier=Digi-Key, ComponentLink2Description=https://datasheet.ciiva.com/7997/81376-7997581.pdf?src-supplier=Element14, ComponentLink2URL=https://datasheet.ciiva.com/7997/81376-7997581.pdf?src-supplier=Element14, ComponentLink3Description=https://datasheet.ciiva.com/9444/ipt1-9444638.pdf?src-supplier=Avnet, ComponentLink3URL=https://datasheet.ciiva.com/9444/ipt1-9444638.pdf?src-supplier=Avnet, Connector Type="Male Pin", Contact Material=Bronze, Contact Mating Length=0.155inch, Contact Plating=Gold, Depth=10.39mm, Gender=Male, Housing Color=Black, Housing Material=Polymer, Lead Free="Lead Free", Length=13.21mm, Manufacturer Part Number=IPT1-105-01-S-D-RA, Mount="Through Hole", Number of Contacts=10, Number of Ports=1, Number of Positions=10, Number of Rows=2, Number of Terminals=10, Orientation="Right Angle", Packaging=Rail/Tube, Pitch=2.54mm, Pricing 1="1=3.53000, 10=3.38400, 100=2.82000, 500=2.39700, 1000=2.04450, 5000=1.83300 (USD)", Radiation Hardening=No, REACH SVHC="No SVHC", RoHS=Yes, Row Spacing=0.1inch, Stock 1=449, Supplier 1=Digi-Key, Termination=Solder
P4 P5 P6: library part CMP-2000-05537-1, "Male Header, Pitch 2.54 mm, 1 x 2 Position, Height 11.7 mm, Tail Length 3.56 mm, 0 to 75 degC, RoHS, Bulk", Current - Max=4A, Manufacturer=Molex, Operating Temperature=0°Cto+75°C, Package Description="2-Leads Header, Body 5.08 x 5.8 mm, Pitch 2.54 mm", Package Version="Rev. BC, 02/2012", PartNumber=0022272021, Voltage - Max=250V, Contact Material=Tinplatedbrass, Current Rating=4A, Datasheet URL=http://www.molex.com/pdm_docs/sd/022272021_sd.pdf, Datasheet Version="Rev. F, 06/2009", Housing Material=Nylon(UL94V-0), Manufacturer URL=http://www.molex.com/, Mounting Technology=ThroughHole, No. of Positions=2, No. of Rows=1, Orientation=Vertical, Package Reference=22-27-2021, Pitch=2.54mm, Voltage Rating=250V
R1 R2 R3 R4 R5 R6 R7: library part CMP-0954-00002-1, "Metal Oxide Varistor, 300 V AC, 385 V DC, 40 J, -40 to 85 degC, 2-Pin 9 x 5.3 x 11 THD mm, RoHS, Bulk", Manufacturer="Vishay Semiconductor", Temp. Range="-40 to 85 degC", Voltage @ 1 mA="470 V", ComponentLink1Description="Manufacturer URL", ComponentLink1URL=http://www.vishay.com/, ComponentLink2Description=Datasheet, ComponentLink2URL=http://www.vishay.com/docs/29081/23815925.pdf, DatasheetVersion=Jun-10, DC="385 V Max.", Energy="40 J Max.", Mounting Technology="Through Hole", PackageDescription="2-Pin THD, Body 9 x 5.3 mm, Height 11 mm", PackageReference=VDRS07-53x22-2, Packing=Bulk, PartNumber=VDRS07H300BSE, RMS="300 V Max.", RoHS=TRUE, Typical CAP. @ 1 kHz="130 pF"
R8: library part CMP-2001-00639-1, Manufacturer=Panasonic, Part Number=ERA6AEB432V
R9: library part CMP-2000-03606-1, Manufacturer="Vishay Dale", Part Number=CRCW060382R0FKEA
R10 R11 R12 R13 R14 R15 R16: library part CRCW0603200RFKEAHP, "CRCW0603200RFKEAHP / Res Thick Film 0603 200 Ohm 1% 0.25W(1/4W) ±100ppm/C Pad SMD Automotive T/R", Case Code (Imperial)=0603, Case Code (Metric)=1608, Manufacturer="Vishay Dale", Max Operating Temperature=155°C, Max Power Dissipation=250mW, Min Operating Temperature=-55°C, Package Quantity=5000, Resistance=200R, Resistor Type="Thick Film", Supplier Part Number 1=541-200SCT-ND, Temperature Coefficient=100ppm/°C, Tolerance=1%, Case/Package=0603, Category="Chip SMD Resistors", ComponentLink1Description=https://datasheet.ciiva.com/2578/crcwhpe3-2578537.pdf?src-supplier=Digi-Key, ComponentLink1URL=https://datasheet.ciiva.com/2578/crcwhpe3-2578537.pdf?src-supplier=Digi-Key, ComponentLink2Description=https://datasheet.ciiva.com/8961/crcwhpe3-8961129.pdf?src-supplier=Avnet, ComponentLink2URL=https://datasheet.ciiva.com/8961/crcwhpe3-8961129.pdf?src-supplier=Avnet, Contact Plating=Tin, Features="Automotive AEC-Q200", Height=0.022inch, Lead Free="Lead Free", Length=0.063inch, Manufacturer Part Number=CRCW0603200RFKEAHP, Mount="Surface Mount", Number of Terminations=2, Packaging="Tape and Reel", Power rating=250mW, Pricing 1="1=0.15000, 10=0.12900, 100=0.05030, 1000=0.02106, 2500=0.01930 (USD)", Radiation Hardening=No, RoHS=Yes, Stock 1=59007, Supplier 1=Digi-Key, Width=0.033inch
S1: "20 Watt 2'' x 1'' Single output 24VDC Regulated SMPS RAC20-24SK", Input Voltage Max="264 VAC", Input Voltage Min="85 VAC", Output current="840 mA", Output Voltage="24 VDC", Supplier Part Number 1=919-RAC20-24SK, Supplier 1=Mouser
U1: library part CMP-0387-00618-2, "1.5 A, Wide Input, Wide Output Adjust Module, -40 to 85 degC, 5-pin Module (EUS5), Pb-Free (RoHS)", Manufacturer="Texas Instruments", ComponentLink1Description="Manufacturer URL", ComponentLink1URL=http://www.ti.com/, ComponentLink2Description=Datasheet, ComponentLink2URL=http://www.ti.com/general/docs/lit/getliterature.tsp?genericPartNumber=PTN78000H&fileType=pdf, ComponentLink3Description="Package Specification", ComponentLink3URL=http://www.ti.com/litv/pdf/mpds139b, ComponentLink4Description="URL Link1", ComponentLink4URL="Samples URL:http://www.ti.com/product/ptn78000h#samples", DatasheetVersion=SLTS230C, Eco-Plan="Pb-Free (RoHS)", Iout(Max)(A)=1.5, Mounting Technology="Through Hole", PackageDescription="5-Pin Plastic Special Shape, Body 12.57 x 18.92 mm", PackageReference=EUS0005A, PackageVersion=4204990-2/C, PartNumber=PTN78000HAH, Regulated Outputs(#)=1, SubFamily="Non-Isolated POL", Vin(Max)(V)=36, Vin(Min)(V)=15, VO Adjustable=TRUE, Vout(Max)(V)=22, Vout(Min)(V)=11.85
U2: "DC DC CONVERTER 5V", Manufacturer=Recom, Max Output Voltage=5V, Supplier Part Number 1=945-3042-ND, Category="Board Mount Modules", ComponentLink1Description=http://www.farnell.com/datasheets/2787641.pdf?src-supplier=Farnell, ComponentLink1URL=http://www.farnell.com/datasheets/2787641.pdf?src-supplier=Farnell, ComponentLink2Description=http://www.farnell.com/datasheets/2229408.pdf?src-supplier=Farnell, ComponentLink2URL=http://www.farnell.com/datasheets/2229408.pdf?src-supplier=Farnell, ComponentLink3Description=https://www.recom-power.com/pdf/Innoline/R-78Bxx-2.0.pdf?src-supplier=Digi-Key, ComponentLink3URL=https://www.recom-power.com/pdf/Innoline/R-78Bxx-2.0.pdf?src-supplier=Digi-Key, Height=17.5mm, Length=11.5mm, Manufacturer Part Number=R-78B5.0-2.0, Pricing 1="1=9,98000, 5=9,79200, 10=9,71800, 25=9,56800, 50=9,26900, 100=8,55000, 250=8,22252, 500=8,07300 (USD)", RoHS=No, Stock 1=498, Supplier 1=Digi-Key, Supplier 2=Newark, Supplier 3=Mouser, Supplier 4=RSComponents, Supplier 5=RSComponents, Supplier 6=Farnell, Supplier Part Number 2=11AC9497, Supplier Part Number 3=919-R-78B5.0-2.0, Supplier Part Number 4=1392821, Supplier Part Number 5=1392959, Supplier Part Number 6=2747528, Weight=4g, Width=8.5mm
XF1 XF2 XF3: "FUSEHOLDER BLOCKS - PCB - CLIP C", Current Rating=20A, Fuse Current=10A, Manufacturer="Wurth Electronics", Supplier Part Number 1=732-11376-ND, Voltage=250V, Category="Fuse Holders", ComponentLink1Description=http://www.farnell.com/cad/1897313.pdf?src-supplier=Element14, ComponentLink1URL=http://www.farnell.com/cad/1897313.pdf?src-supplier=Element14, ComponentLink2Description=https://katalog.we-online.de/em/datasheet/696108003002.pdf?src-supplier=Digi-Key, ComponentLink2URL=https://katalog.we-online.de/em/datasheet/696108003002.pdf?src-supplier=Digi-Key, Contact Material="Copper Alloy", Contact Plating=Tin, Manufacturer Part Number=696108003002, Mount=PCB, Number of Circuits=1, Orientation=Horizontal, Pricing 1="1=0.64000, 10=0.60500, 50=0.57460, 100=0.51300, 250=0.45144, 500=0.36936 (USD)", REACH SVHC=Unknown, RoHS=No, Stock 1=2780, Supplier 1=Digi-Key, Termination="PC Pin", Voltage Rating (AC)=250V

## Free pads (board coordinates)
  round 3.75 hole 2: 3(114,42.967) 3(123,70.967) 3(124,118.967)
  round 0.5 hole 1 slot 50 at 0 deg unplated: *(95,30.967)

## Via types
v1: diameter 0.55, hole 0.3, Top Layer to Bottom Layer, 8 vias

## Nets (pads, with @x,y where several pads share a name; then routed paths per layer and width w, separated by ;. In a path a pad name is that pad's centre, name@x,y a point inside that pad or via, vN(x,y) a via of type N, cw(c..) or ccw(c..) an arc to the next point about the centre after c; other vN are vias at no path point)
GND: C7.2 C8.1 C9.2 C10.2 C11.2 C14.1 C15.2 C16.2 J1.5 P4.1 P5.1 P6.1 R7.2 R8.1 R9.2 R12.1 R16.1 S1.4 U1.1 U2.2 | length 60.7
  Top Layer w0.254: R16.1 77.405,22.727 v1(78.17,22.727) ; R12.1 115.41,7.317 v1(115.41,5.997)
  Top Layer w1: v1(61.25,12.217) C10.2 65.9,12.217 69.6,15.917 69.6,15.967 69.85,16.217 C11.2 v1(72.25,16.217) ; C15.2 63.013,2.479 75.988,2.479 C16.2 81,2.467 v1(81.375,2.842) ; C14.1@91.89,9.007 C14.1 92.01,9.107 P5.1@98.34,9.107 ; R8.1 101.964,15.992 102.55,16.578 102.55,17.167 102.75,17.367 C8.1@103.35,17.367 ; C8.1 103.05,17.667 C8.1@103.35,17.367 ; v1(104.75,17.167) 103.55,17.167 C8.1@103.35,17.367
  Top Layer w2.5: J1.5 4.608,90.659 R7.2
  Bottom Layer w1: S1.4 S1.4@46.855,4.982
  other v1: 102.75,7.167 110.3,16.467
N: C12.2 C13.2 J1.4 R1.2 R2.2 R3.2 R7.1 S1.1 | length 171.8
  Top Layer w2: C12.2 23.25,32.967 C13.2 35.75,33.217 53.25,50.717 ; R1.2 36.952,67.015 53.25,50.717 ; S1.1 53.25,50.717
  Top Layer w2.5: J1.4 6.367,104.27 9.858,100.779 9.858,92.609 R7.1
  Bottom Layer w2: R7.1 25.9,76.567 35.652,76.567 R1.2 R2.2 R3.2 ; S1.1 S1.1@57.048,50.765
  Bottom Layer w2.5: J1.4 6.367,104.27 9.858,100.779 9.858,92.609 R7.1
NetC8_2: C8.2 L3.1 U1.5 | length 14.2
  Top Layer w2: U1.5 C8.2 103.05,25.859 L3.1
NetC11_1: C11.1 L2.2 U1.2 | length 13.5
  Top Layer w1: L2.2 C11.1 70.605,19.322 80.195,19.322 U1.2
NetC16_1: C16.1 L4.2 U2.1 | length 12.8
  Top Layer w1: L4.2 72.4,5.467 72.9,4.967 C16.1 76.25,4.967 76.35,5.067 76.35,5.267 U2.1
NetLED1_1: LED1.1 R9.1 | length 1.6
  Top Layer w0.254: R9.1 LED1.1
NetLED2_1: LED2.1 R10.2 | length 1.4
  Top Layer w0.254: R10.2 115.4,14.507 LED2.1
NetLED3_1: LED3.1 R13.2 | length 1.6
  Top Layer w0.254: LED3.1 R13.2
NetR8_2: R8.2 U1.4 | length 2.5
  Top Layer w1: U1.4@96.18,15.947 96.353,16.12 98.5,16.12 R8.2
  Bottom Layer w1: U1.4@96.17,15.957 U1.4@96.18,15.947 ; U1.4@96.17,16.257 U1.4
NetR10_1: R10.1 R11.2 | length 1.4
  Top Layer w0.254: R11.2 115.39,11.587 R10.1
NetR11_1: R11.1 R12.2 | length 1.2
  Top Layer w0.254: R11.1 115.38,8.847 R12.2
NetR13_1: R13.1 R14.2 | length 1.2
  Top Layer w0.254: R13.1 R14.2
NetR14_1: R14.1 R15.1 | length 1
  Top Layer w0.254: R14.1 R15.1
NetR15_2: R15.2 R16.2 | length 1.3
  Top Layer w0.254: R15.2 R16.2
PhG1: C6.1 L1.6 R1.1 R4.1 R6.2 XF1.1 | length 171.5
  Top Layer w2: R4.1 38.571,130.157 38.571,121.233 XF1.1
  Top Layer w7: XF1.1 66.537,119.62 84.13,102.027 95.673,102.027 L1.6
  Bottom Layer w2: R6.2 17.2,133.217 20.94,136.957 31.771,136.957 R4.1 ; R1.1 24.952,87.067 24.952,107.614 XF1.1
  Bottom Layer w7: L1.6@100.812,107.166 C6.1
PhG2: C5.1 L1.5 R2.1 R4.2 R5.1 XF2.1 | length 97.4
  Top Layer w2: R5.1 30.125,129.557 30.125,116.547 XF2.1
  Top Layer w7: XF2.1 46.59,109.714 C5.1 66.222,100.896 L1.5
  Bottom Layer w2: R5.1 32.225,127.457 R4.2 ; R2.1 28.452,89.567 28.452,101.208 XF2.1
PhG3: C4.1 L1.4 R3.1 R5.2 R6.1 XF3.1 | length 175.6
  Top Layer w2: R6.1 25.005,127.477 26.5,125.982 26.5,110.273 36.79,99.983 36.91,99.983 XF3.1
  Bottom Layer w2: R3.1 31.952,94.929 XF3.1
  Bottom Layer w7: XF3.1 43.5,93.393 43.5,84.717 53.968,74.249 L1.4 88.599,78.798 76.202,91.195 C4.1
PhL1: C1.1 L1.1 P1.1 P1.2 P1.3 P1.4 P1.5 P1.6 P1.7 P1.8 P1.9 P1.10 pad.3@123,70.967 | length 21.2
  Bottom Layer w7: C1.1 100.447,69.896 L1.1
PhL2: C2.1 L1.2 P2.1 P2.2 P2.3 P2.4 P2.5 P2.6 P2.7 P2.8 P2.9 P2.10 pad.3@124,118.967 | length 38.3
  Bottom Layer w7: L1.2 88.599,107.358 110.868,85.089 C2.1
PhL3: C3.1 L1.3 P3.1 P3.2 P3.3 P3.4 P3.5 P3.6 P3.7 P3.8 P3.9 P3.10 pad.3@114,42.967 | length 11
  Bottom Layer w7: C3.1 66.062,87.375 L1.3
PhSI1: D1.2 J1.1 XF1.2 | length 90.4
  Top Layer w1: XF1.2@14.248,119.51 14.468,119.51 22,111.978 D1.2
  Top Layer w3: J1.1 XF1.2@14.248,119.51
  Bottom Layer w3: J1.1 14.248,119.51 XF1.2
PhSI2: D2.2 J1.2 XF2.2 | length 83
  Top Layer w1: XF2.2 18.5,105.572 D2.2
  Top Layer w3.5: J1.2 9.642,114.43 XF2.2
  Bottom Layer w3.5: J1.2 9.642,114.43 XF2.2
PhSI3: D3.2 J1.3 XF3.2 | length 79
  Top Layer w1: XF3.2 14.358,99.597 15,98.955 D3.2
  Top Layer w3.5: J1.3 4.68,109.422 7.579,109.422 12.287,104.714 12.308,104.714 14.358,102.664 XF3.2
  Bottom Layer w3.5: J1.3 4.68,109.422 7.579,109.422 12.287,104.714 12.308,104.714 14.358,102.664 XF3.2
RECT: C12.1 C13.1 D1.1 D2.1 D3.1 S1.2 | length 62.9
  Top Layer w1: C13.1@9.75,32.967 9.75,42.867 14.92,48.037 D3.1 D2.1 18.525,48.062 21.975,48.062 D1.1 34.05,48.087 S1.2
  Top Layer w1.5: C12.1 C13.1@9.75,32.967
  Top Layer w2: C12.1 10,12.717 C12.1@12.5,12.717
VCC_5V: C14.2 LED1.2 P5.2 U2.3 | length 16.3
  Top Layer w1: U2.3 87.355,10.942 91.875,10.942 C14.2 92.1,10.817 92.92,11.637 P5.2 98.48,11.767 LED1.2
  Bottom Layer w1: U2.3 U2.3@87.255,11.042
VCC_18V: C9.1 L3.2 LED2.2 P4.2 | length 14.2
  Top Layer w0.254: 112.79,21.731 112.79,16.887 LED2.2 LED2.2@114.035,15.642
  Top Layer w1: C9.1@110.3,19.167 C9.1 110.3,21.775 110.344,21.731 112.79,21.731 P4.2@115.236,21.731
VCC_24V: C10.1 C15.1 L2.1 L4.1 LED3.2 P6.2 S1.5 | length 40.1
  Top Layer w0.254: 62.73,23.389 63.377,22.742 LED3.2
  Top Layer w1.5: C10.1@62.501,15.217 63.108,15.824 L2.1 63.108,19.433 62.73,19.811 62.73,23.389 P6.2 ; C10.1 58.75,15.217 57,13.467 S1.5 57.028,4.969 66.602,4.969 67.1,5.467 L4.1
VNG: C4.2 C5.2 C6.2 | length 75.9
  Bottom Layer w7: C5.2 61.479,134.467 93.478,134.467 ; C4.2 93.978,134.467 93.478,134.467 ; C6.2 93.677,134.666 93.478,134.467
VNL: C1.2 C2.2 C3.2 C7.1 | length 74.4
  Bottom Layer w7: C7.1 51.242,59.875 C3.2 58.363,62.83 C1.2 74.994,53.717 107.543,53.717 C2.2
pads on no net: L1.MH1 MH1.* MH2.* MH3.* MH4.* MH5.* MH6.* S1.3 U1.3

## Polygon pours and split planes (outlines as drawn)
PhL3 on Top Layer "PHL3_L01_P003" (solid, pour order 3): 63,90.967 69.5,90.967 69.5,79.097 99.13,49.467 128,49.467 128,34.467 122,34.467 122,39.967 97.7,39.967 63,74.667
PhL1 on Top Layer "PHL1_L01_P002" (solid, pour order 2): 97,84.467 104,84.467 104,75.967 105.5,74.467 122,74.467 122,93.967 128,93.967 128,68.967 126.84,67.807 102.16,67.807 97,72.967
PhL2 on Top Layer "PHL2_L01_P000" (solid, pour order 0): 122,138.967 128,138.967 128,117.967 123.66,113.627 85.11,113.627 85.11,119.467 120.5,119.467 122,120.967
PhL2 on Top Layer "PHL2_L01_P004" (solid, pour order 4): 85.1,119.497 85.1,110.697 92.07,110.697 92.07,119.497
GND on Bottom Layer "GND_L02_P006" (solid, pour order 6): 1,69.967 1,100.967 7,100.967 7,90.967 11,86.967 11,69.967
GND on Bottom Layer "GND_L02_P005" (solid, pour order 5): 1,69.967 1,1.867 118,1.867 118,29.967 46,29.967 23.5,52.467 23.5,69.967

## Silkscreen, mask and mechanical layers (free items; w line width, h text height)
Top Overlay:
  text "EMC + Fuentes +inAC / v 2.0 - 2020 / AHWV/LSZ / F - IT18I0090" at 62.87,40.217 h1
Board:
  the board outline again, w0.254

## Dimensions
126,100 to 129,0 on Dimensions
126,3 to 129,0 on Dimensions
126,3 to 129,0 on Dimensions
0,0 to 129,0 on Dimensions
44.37,137.08 to 0,140.081 on Dimensions
3,137.08 to 0,140.081 on Dimensions
3,137.08 to -1.285,140.081 on Dimensions
0,0 to 0,140.081 on Dimensions
3,3 to 0,0 on Dimensions
3,3 to 0,0 on Dimensions